# Altium PCB IFA_ESP32.PcbDoc
Units mil, origin at the board's own origin, x right, y up, seen from the top; angles counter-clockwise.
Board outline 1810 x 1230 mil, 4 copper layers (Top Layer, Int1 (GND), Int2 (PWR), Bottom Layer), stack 61.653 mil thick; 42 components, 32 nets, 159 pads, 130 vias.
Unrouted connection lines stored in the file: 1.
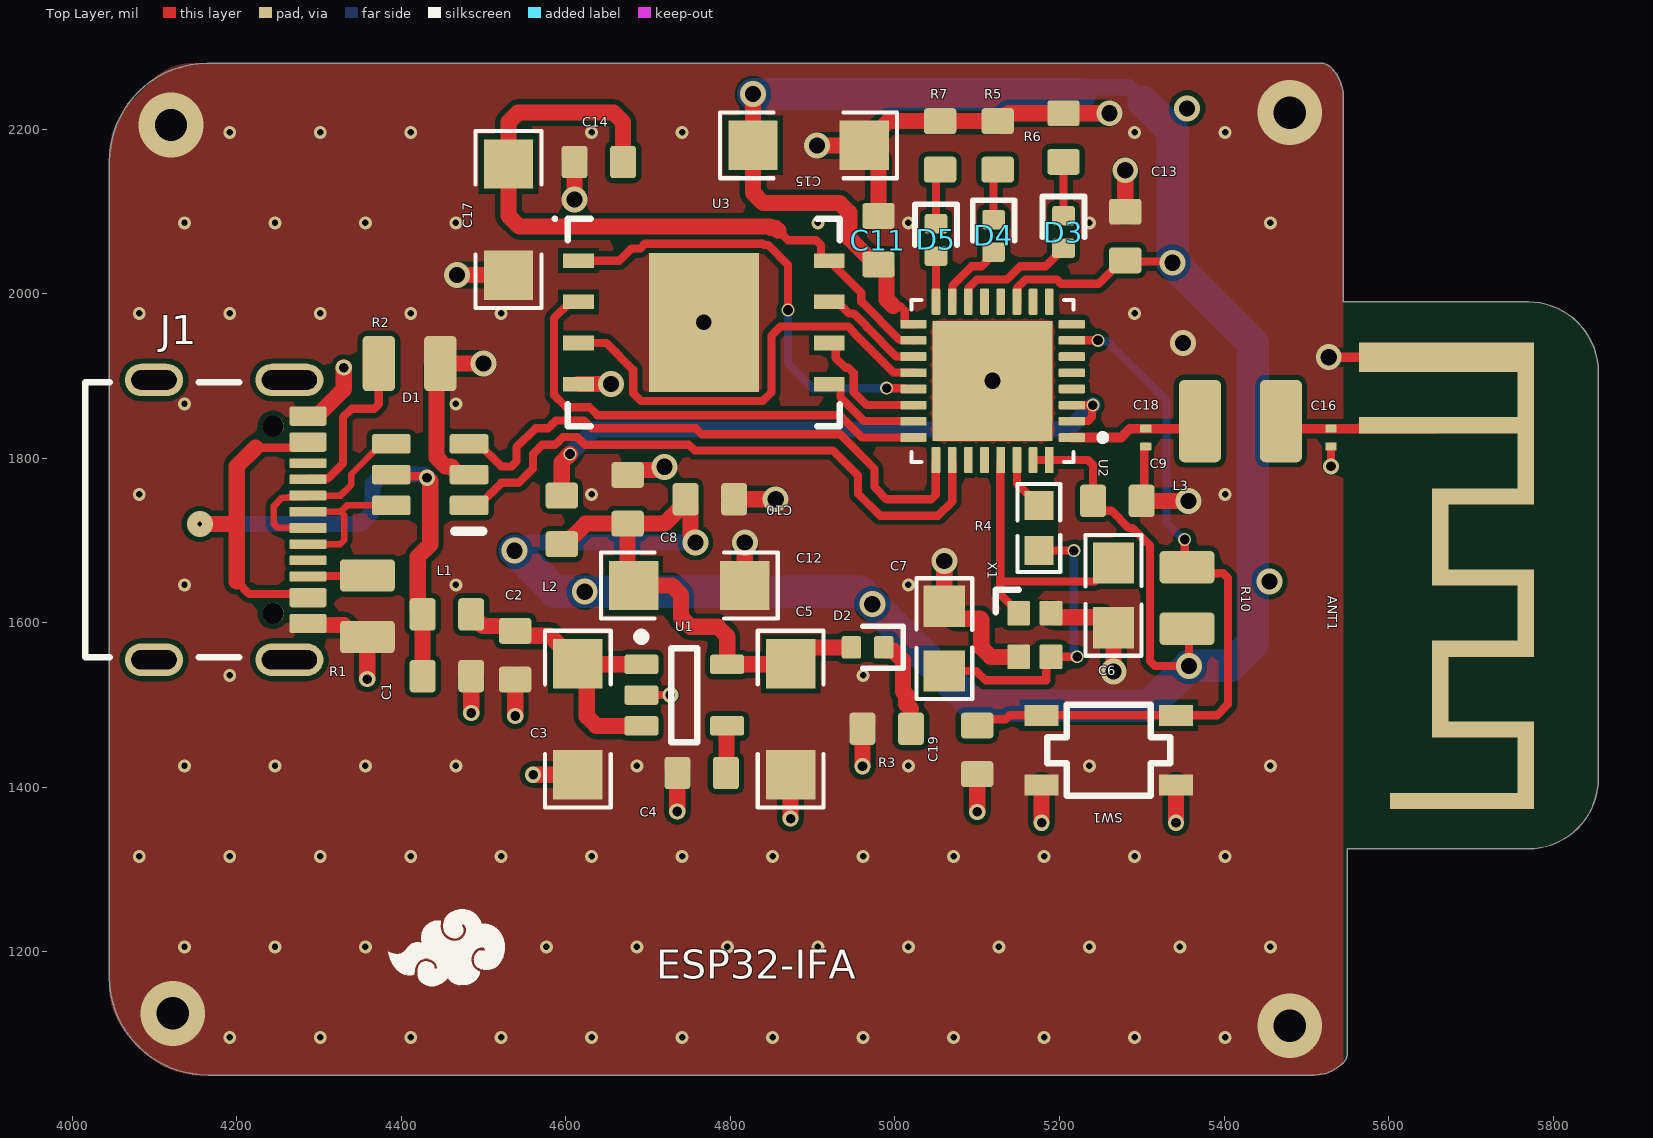
[diagram p0: Top Layer view]
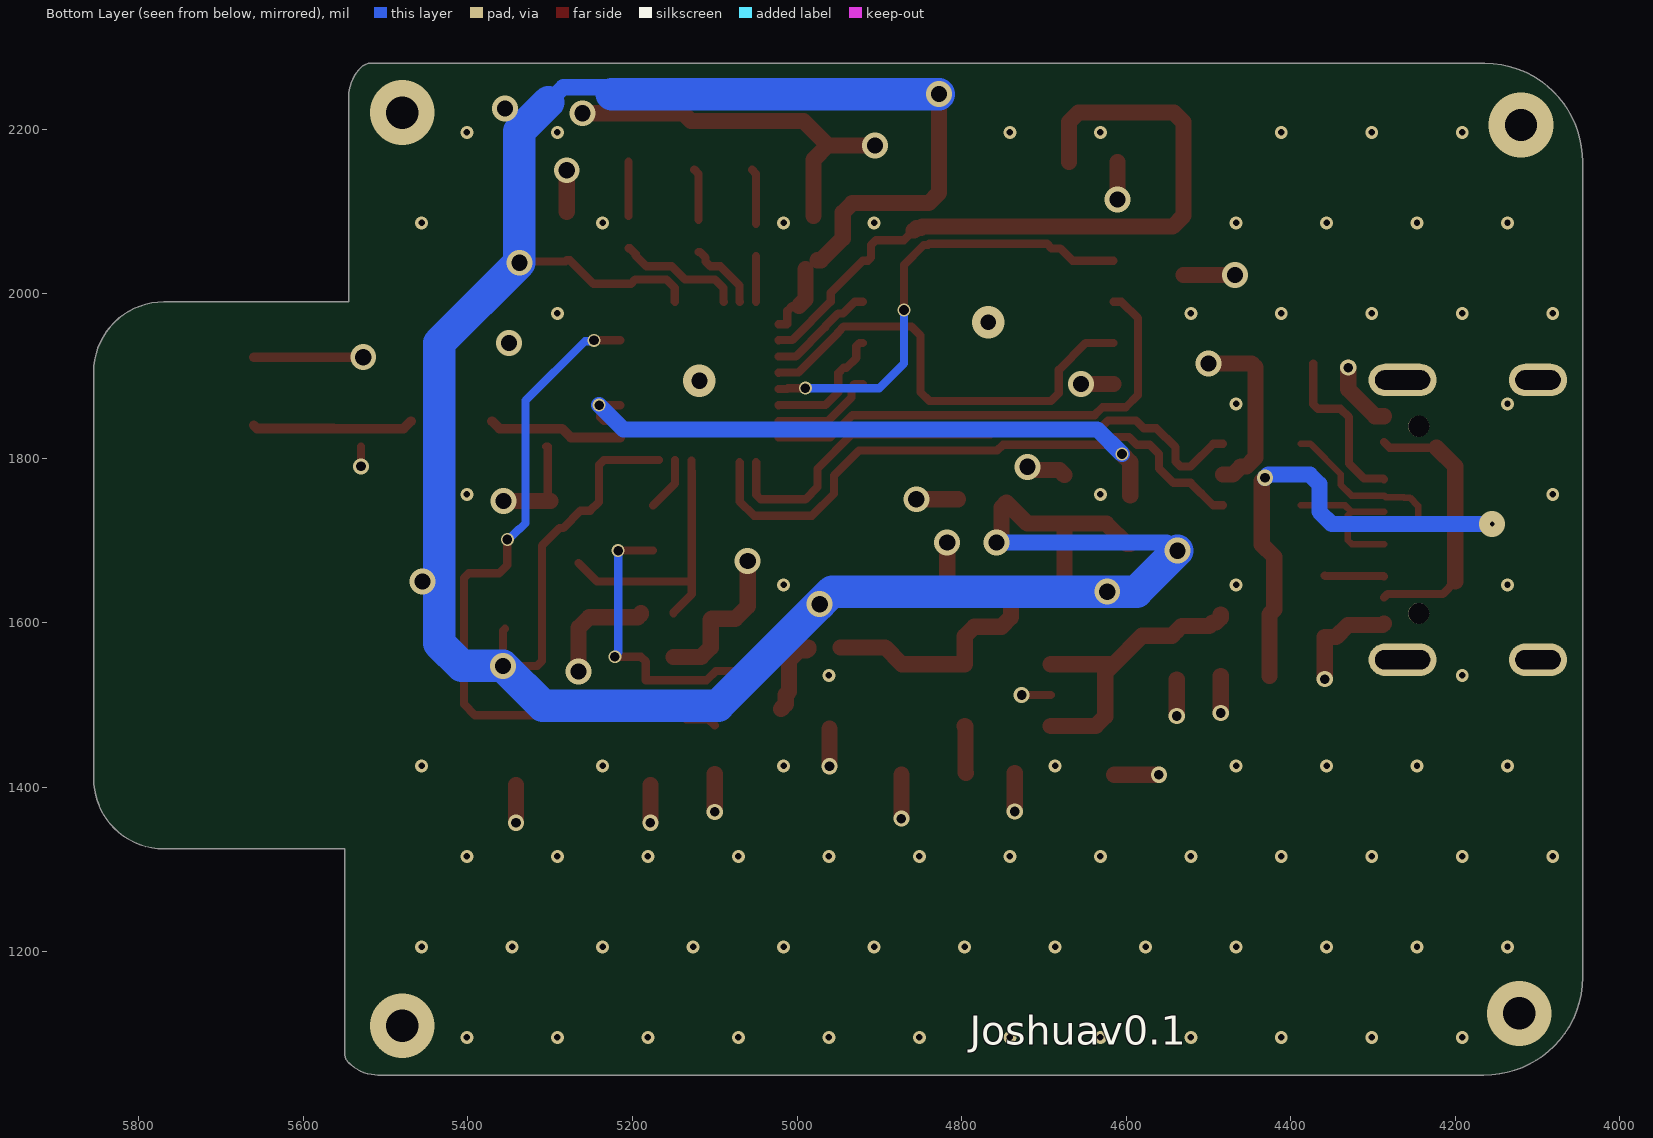
[diagram p1: Bottom Layer view, seen from below]
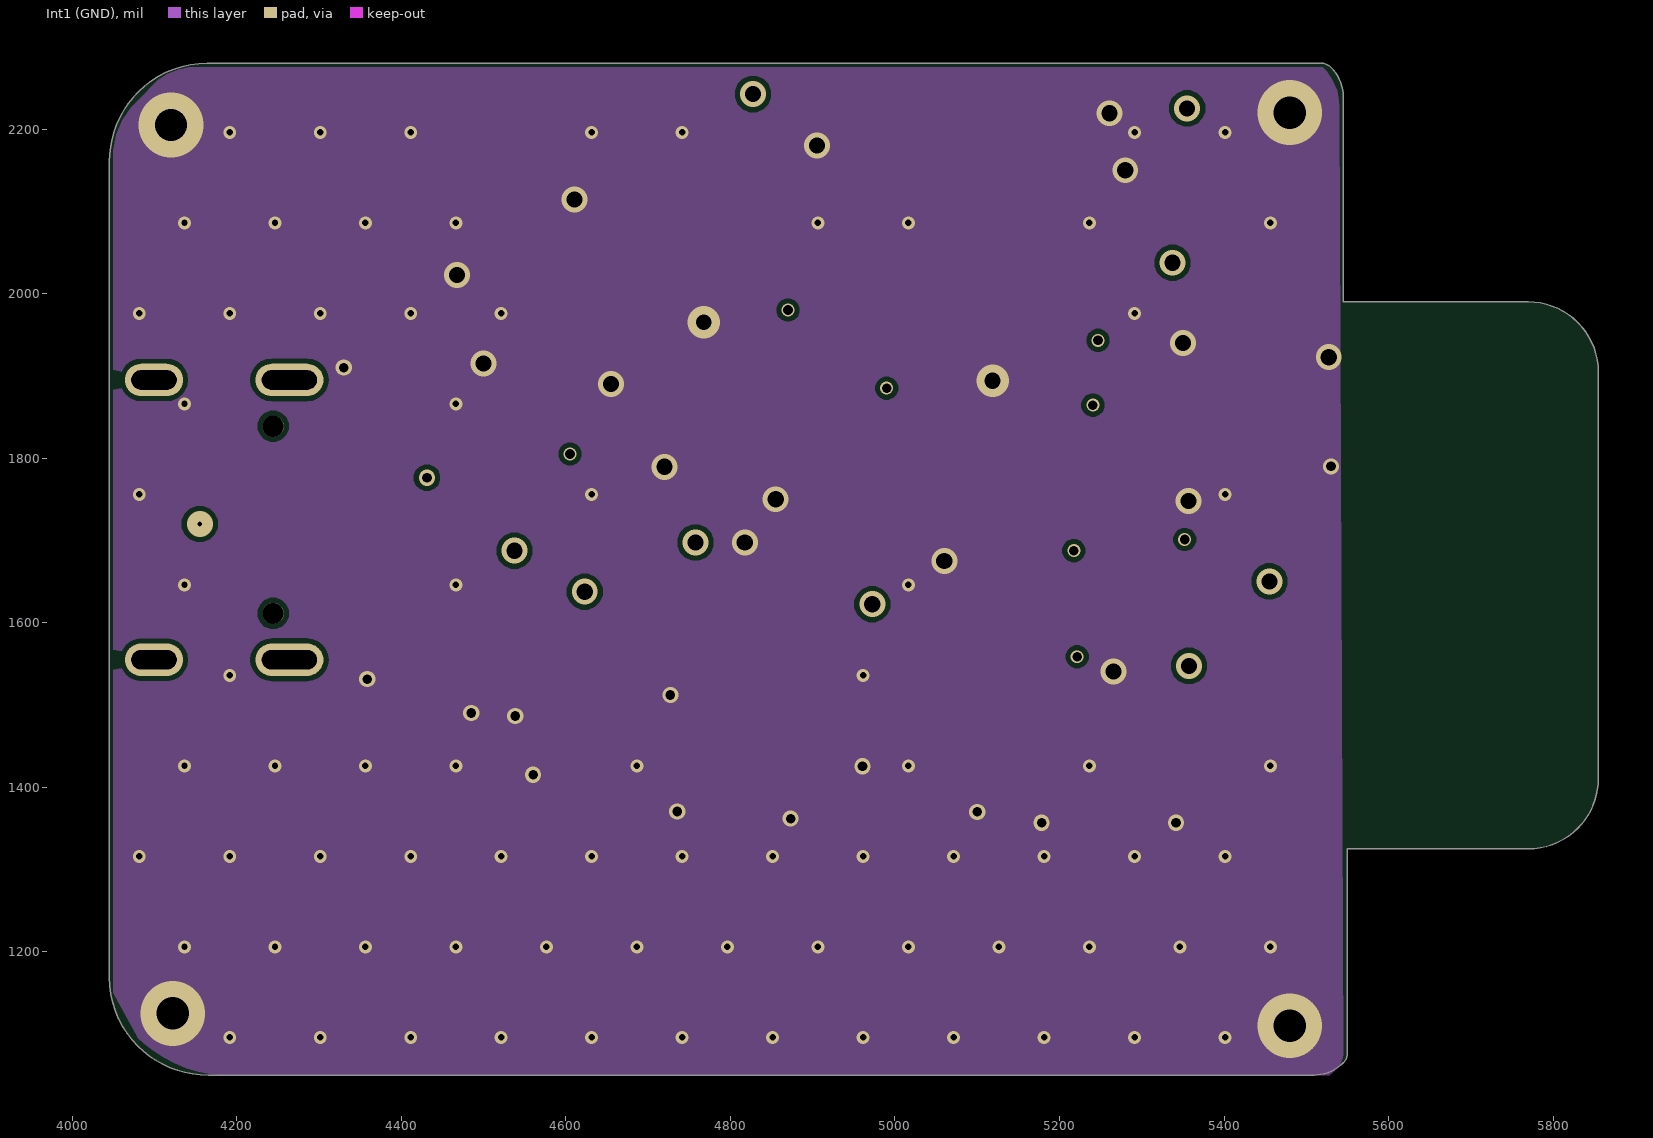
[diagram p2: Int1 (GND)]
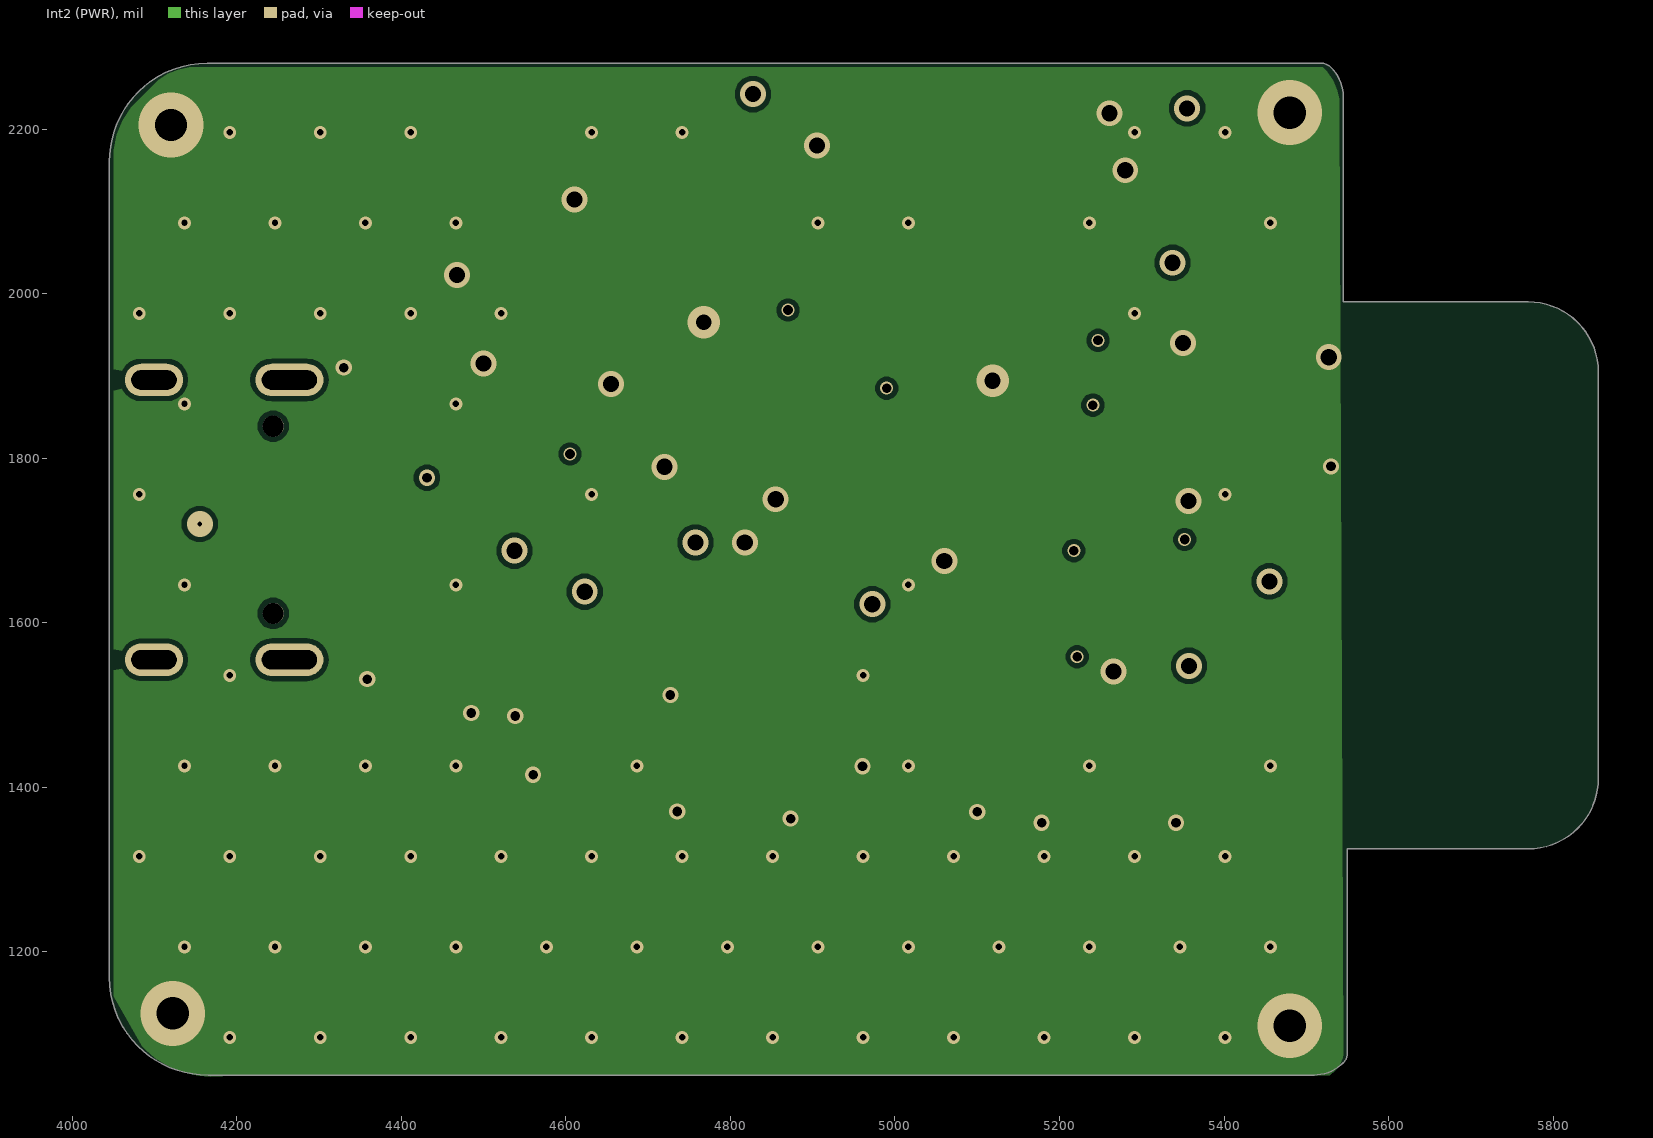
[diagram p3: Int2 (PWR)]
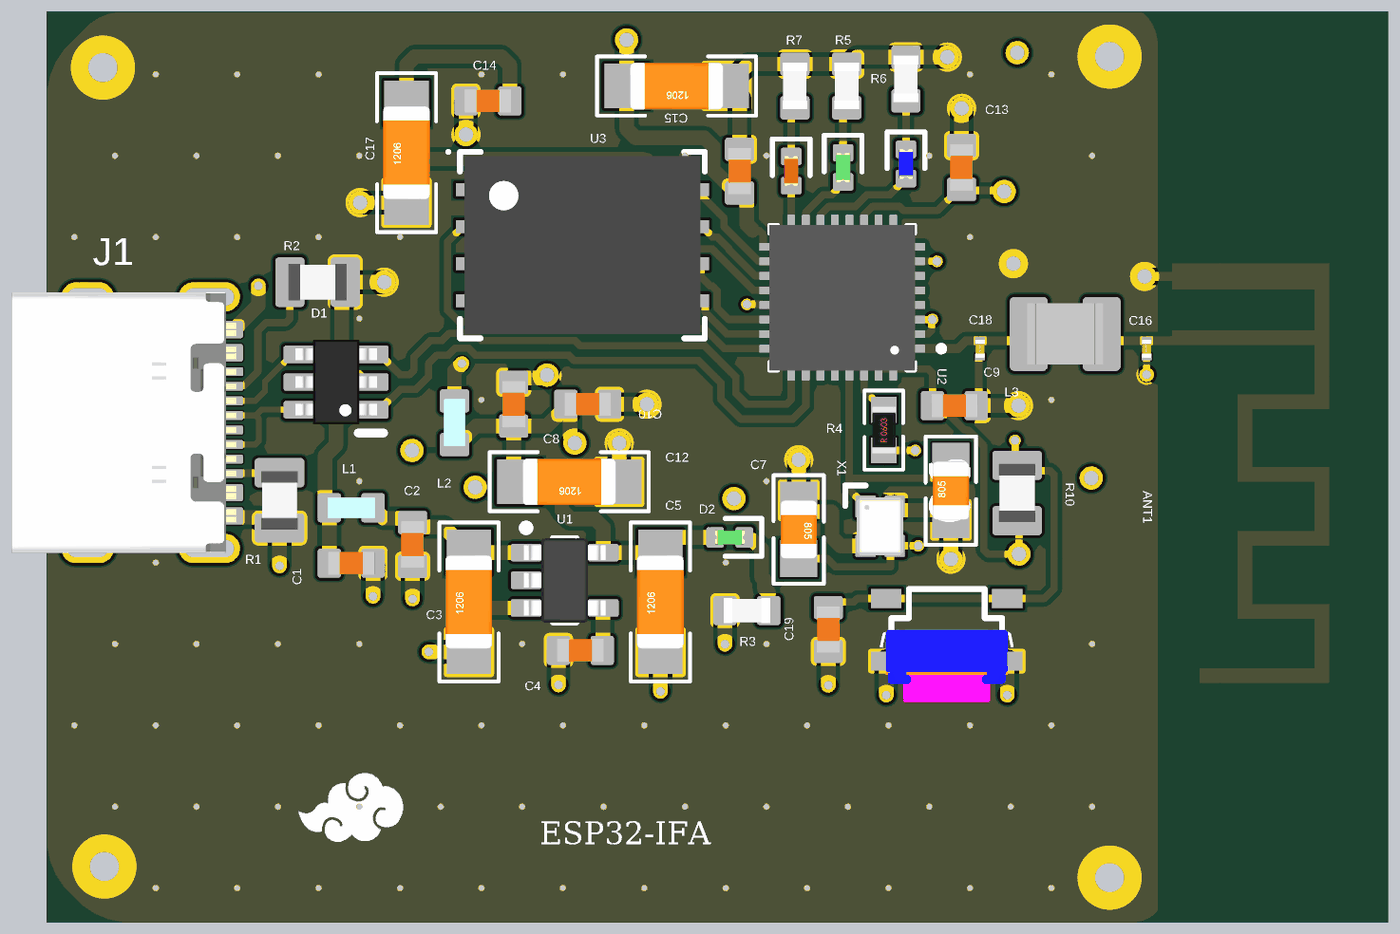
[diagram p4: 3D render of the assembled board from above, using the file's embedded part models]

## Layer stack, top to bottom
Top Solder: solder mask 1, SM-001, Dk 4
Top Layer: signal copper 1.378
Dielectric 1: prepreg 7.992, PP-017, Dk 4.3
Int1 (GND): signal copper 1.181
Dielectric 3: core 40.551, Core-039, Dk 4.8
Int2 (PWR): signal copper 1.181
Dielectric 5: prepreg 7.992, PP-017, Dk 4.3
Bottom Layer: signal copper 1.378
Bottom Solder: solder mask 1, SM-001, Dk 4

## Board outline
4045,1168.99 4045,2160 cw(c4165.71,2160) 4080.36,2245.36 cw(c4163.99,2161.72) 4163.99,2280 5517.93,2280 cw(c5517.93,2262.93) 5530,2275 cw(c5493.79,2238.79) 5545,2238.79 5545,1990 5769.64,1990 cw(c5769.64,1904.64) 5830,1965 cw(c5769.64,1904.64) 5855,1904.64 5855,1410.36 cw(c5769.64,1410.36) 5830,1350 cw(c5769.64,1410.36) 5769.64,1325 5550,1325 5550,1077.07 cw(c5532.93,1077.07) 5545,1065 cw(c5508.79,1101.21) 5508.79,1050 5510,1050 4165,1050 cw(c4165,1170.71) 4079.64,1085.36 cw(c4163.28,1168.99)

## Design rules (kind name [scope] priority, off if disabled: settings)
Clearance [All] p1: gap=6 ignorepadtopadclearanceinfootprint=TRUE
DiffPairsRouting [InDifferentialPair('MCU_USB_D')] p1: maxlimit=10 minlimit=10 mostfreqgap=10 toplayer_minwidth=8 toplayer_maxwidth=15 toplayer_prefwidth=15 midlayer1_minwidth=8 midlayer1_maxwidth=15 midlayer1_prefwidth=15 midlayer2_minwidth=8 midlayer2_maxwidth=15 midlayer2_prefwidth=15 bottomlayer_minwidth=8 bottomlayer_maxwidth=15 bottomlayer_prefwidth=15 maxuncoupledlength=500
PolygonConnect [All] p1: connectstyle=Direct reliefconductorwidth=10 reliefentries=4 polygonreliefangle="90 Angle" airgapwidth=10
RoutingVias [All] p1: holewidth=11.81 width=19.68 viastyle="Through Hole" minholewidth=6 minwidth=11.81 maxholewidth=39.37 maxwidth=78.74
SolderMaskExpansion [All] p1: expansion=4 istentingtop=FALSE
SupplyNets "Schematic Supply Nets_4" [InNet('+VBUS')] p1: voltage=0.000
SupplyNets "Schematic Supply Nets_3" [InNet('VDD_SPI')] p2: voltage=0.000
SupplyNets "Schematic Supply Nets_2" [InNet('GND')] p3: voltage=0.000
SupplyNets "Schematic Supply Nets_1" [InNet('+VBUS_FLT')] p4: voltage=0.000
SupplyNets "Schematic Supply Nets" [InNet('3V3')] p5: voltage=0.000
Width [All] p1: maxlimit=39.37 minlimit=10 preferedwidth=10
29 further rules are at their usual default settings.

## Classes and differential pairs
differential pair USB_D: +USB_D_P -USB_D_N
differential pair MCU_USB_D: +MCU_USB_D_P -MCU_USB_D_N

## Components (designator, comment, footprint, x,y, rotation, side; value= is the part's Value field where it differs from the comment)
ANT1 "PCB Antenna 2.4GHz 50Ohm" ANT_IFA_USB_2_4GHZ_50R 5564.06,1922.72 r270 top
C1 "100nF" CAP_0603 4455.36,1535 r180 top
C2 "100nF" CAP_0603 4538.33,1560.46 r90 top
C3 "10uF" CAP_1206 4614.33,1482.68 r90 top
C4 "100nF" CAP_0603 4765,1417.26 r0 top
C5 "10uF" CAP_1206 4873.02,1482.68 r90 top
C6 "12pF" CAP_0805 5265.57,1633.14 r90 top
C7 "12pF" CAP_0805 5060,1580.62 r270 top
C8 "100nF" CAP_0603 4675,1750 r270 top
C9 "100nF" CAP_0603 5270.25,1748.06 r180 top
C10 "100nF" CAP_0603 4775,1750 r180 top
C11 "100nF" CAP_0603 4980,2065.04 r270 top
C12 "10uF" CAP_1206 4750,1645 r180 top
C13 "100nF" CAP_0603 5280,2070 r270 top
C14 "100nF" CAP_0603 4640,2160 r0 top
C15 "10uF" CAP_1206 4895,2180 r180 top
C16 "3p3" CAP_0201 5530,1825 r90 top
C17 "10uF" CAP_1206 4530,2090 r90 top
C18 "3p3" CAP_0201 5305,1825 r90 top
C19 "1uF" CAP_0603 5100,1445.46 r90 top
D1 "USBLC6-2SC6" SOT-23-6 4435,1780 r90 top
D2 "GREEN" LED_0402_GREEN 4966.74,1570 r0 top
D3 "BLUE" LED_0402_BLUE 5204.91,2074.73 r90 top
D4 "GREEN" LED_0402_GREEN 5119.91,2070.2 r90 top
D5 "RED" LED_0402_RED 5049.91,2065.2 r90 top
J1 "USB4105-GF-A-060" USB4105-GF-A-060 4192.93,1725 r270 top
L1 "2nH" IND_0603 4455.36,1610 r0 top
L2 "2nH" IND_0603 4595,1725 r270 top
L3 "2n2" IND_1008 5420,1845 r180 top
R1 "5k1" RES_0805 4358.61,1620 r90 top
R2 "5k1" RES_0805 4410,1915 r180 top
R3 "1k" RES_0603#1 4990,1471.06 r0 top
R4 "1.6K" RES_0603#2 5175,1715.06 r90 top
R5 "R0603" RES_0603#1 5204.91,2189.73 r270 top
R6 "R0603" RES_0603#1 5124.91,2180.2 r270 top
R7 "R0603" RES_0603#1 5054.91,2180.2 r270 top
R10 "5k1" RES_0805 5355,1630 r270 top
SW1 "SKRPANE010" SKRPANE010 5260,1445 r180 top
U1 "SPX3819M5-L-3-3/TR" SOT-23-5 4743.87,1511.98 r0 top
U2 "ESP32-C3" QFN50P500X500X90-33N 5118.74,1893.96 r180 top
U3 "W25Q128JVEIQ" WSON-8-8X6 4767.74,1965 r0 top
X1 "40MHz" XTAL_2016 5170,1585 r270 top

## Footprints (in the part's own frame and the unit in brackets; to place one, negate y for a bottom-side part, rotate by r counter-clockwise, add the part's x,y. Pads: shape width x height; smd on the part's side, far side on the other; paste and mask are expansions set on the pad)
ANT_IFA_USB_2_4GHZ_50R [mm]
  rect 5x0.5 smd paste-2539.97 mask+0.102: 1(2.05,5.15)
  rect 0.5x4.9 smd paste-2539.97 mask+0.102: 1(2.1,2.45)
  rect 0.5x2.64 smd paste-2539.97 mask+0.102: 1(4.3,3.58) 1(6.8,3.58) 1(9,3.58) 1(11.5,3.58)
  rect 2x0.5 smd paste-2539.97 mask+0.102: 1(5.55,2.51) 1(10.25,2.51)
  rect 2.7x0.5 smd paste-2539.97 mask+0.102: 1(7.9,5.15) 1(12.6,5.15)
  rect 0.5x3.94 smd paste-2539.97 mask+0.102: 1(13.7,2.93)
  rect 0.9x4.9 smd paste-2539.97 mask+0.102: 2(0,2.45)
CAP_0201 [mm]
  rrect25% 0.25x0.35 smd mask+0.05: 1(-0.275,0) 2(0.275,0)
  body extent -0.32,-0.17 0.32,0.16, height 0.34
CAP_0603 [mm]
  rrect25% 0.8x1 smd: 1(-0.75,0) 2(0.75,0)
  body extent -0.8,-0.4 0.8,0.4, height 0.51
CAP_0805 [mil] "Ceramic Capacitor"
  rect 50x50 smd mask+3: 1(-39.37,0) 2(39.37,0)
  silkscreen extent -73,-34 73,34, body extent -39,-25 39,25, height 31
CAP_1206 [mil] "Ceramic Capacitor"
  rect 60x60 smd: 1(-67.49,-0.2) 2(67.51,-0.2)
  silkscreen extent -107,-40 108,40, body extent -63,-31 63,32, height 39
IND_0603 [mm]
  rrect25% 0.8x1 smd: 1(-0.75,0) 2(0.75,0)
  body extent -0.81,-0.37 0.81,0.37, height 0.87
IND_1008 [mm]
  rrect25% 1.3x2.54 smd: 1(-1.25,0) 2(1.25,0)
  body extent -1.3,-1.05 1.3,1.05, height 1.71
LED_0402_BLUE [mm]
  rrect25% 0.6x0.7 smd: A(-0.5,0) K(0.5,0)
  silkscreen extent -0.15,-0.65 1.1,0.65, body extent -0.51,-0.25 0.51,0.25, height 0.45
LED_0402_GREEN [mm]
  rrect25% 0.6x0.7 smd: A(-0.5,0) K(0.5,0)
  silkscreen extent -0.15,-0.65 1.1,0.65, body extent -0.51,-0.25 0.51,0.25, height 0.45
LED_0402_RED [mm]
  rrect25% 0.6x0.7 smd: A(-0.5,0) K(0.5,0)
  silkscreen extent -0.15,-0.65 1.1,0.65, body extent -0.51,-0.25 0.51,0.25, height 0.45
QFN50P500X500X90-33N [mm]
  rrect25% 0.81x0.27 smd mask+0: 1(-2.445,1.75) 2(-2.445,1.25) 3(-2.445,0.75) 4(-2.445,0.25) 5(-2.445,-0.25) 6(-2.445,-0.75) 7(-2.445,-1.25) 8(-2.445,-1.75) 17(2.445,-1.75) 18(2.445,-1.25) 19(2.445,-0.75) 20(2.445,-0.25) 21(2.445,0.25) 22(2.445,0.75) 23(2.445,1.25) 24(2.445,1.75)
  rrect25% 0.27x0.81 smd mask+0: 9(-1.75,-2.445) 10(-1.25,-2.445) 11(-0.75,-2.445) 12(-0.25,-2.445) 13(0.25,-2.445) 14(0.75,-2.445) 15(1.25,-2.445) 16(1.75,-2.445) 25(1.75,2.445) 26(1.25,2.445) 27(0.75,2.445) 28(0.25,2.445) 29(-0.25,2.445) 30(-0.75,2.445) 31(-1.25,2.445) 32(-1.75,2.445)
  rect 3.7x3.7 smd paste-0.68 mask+0.05: 33(0,0)
  silkscreen extent -3.5,-2.5 2.5,2.5, body extent -2.5,-2.5 2.5,2.5, height 0.9
RES_0603#1 [mm]
  rrect25% 0.8x1 smd: 1(-0.75,0) 2(0.75,0)
  body extent -0.8,-0.43 0.8,0.43, height 0.52
RES_0603#2 [mm] "CASE: 0603"
  rect 0.889x0.889 smd mask+0.076: 1(-0.698,0) 2(0.699,0)
  silkscreen extent -1.36,-0.66 1.36,0.66, body extent -0.8,-0.4 0.8,0.4, height 0.46
RES_0805 [mm]
  rrect25% 1x1.7 smd: 1(-0.95,0) 2(0.95,0)
  body extent -1,-0.63 1,0.63, height 0.47
SKRPANE010 [mm]
  rect 1.05x0.65 smd: 12(-2.075,1.075) 12(2.075,1.075) 34(-2.075,-1.075) 34(2.075,-1.075)
  silkscreen extent -1.9,-1.4 1.9,1.4, body extent -2.3,-1.6 2.3,1.6, height 2.51
SOT-23-5 [mm] "SOT23, 5-Leads, Body 2,90x2,80mm, Pitch 0,95mm, IPC Medium Density"
  rrect25% 1.05x0.6 smd: 1(-1.325,0.95) 2(-1.325,0) 3(-1.325,-0.95) 4(1.325,-0.95) 5(1.325,0.95)
  silkscreen extent -1.45,-1.45 0.4,1.92, body extent -1.4,-1.45 1.4,1.45, height 1.45
SOT-23-6 [mm]
  rrect25% 0.6x1.2 smd: 1(-0.95,-1.2) 2(0,-1.2) 3(0.95,-1.2) 4(0.95,1.2) 5(0,1.2) 6(-0.95,1.2)
  silkscreen extent -1.75,-1.63 -1.75,-0.76, body extent -1.45,-1.4 1.45,1.4, height 1.45
USB4105-GF-A-060 [mm]
  rrect25% 0.6x1.15 smd mask+0.05: A1B12(-3.2,2.378) A4B9(-2.4,2.378) B1A12(3.2,2.378) B4A9(2.4,2.378)
  rrect25% 0.3x1.15 smd mask+0.05: A5(-1.25,2.378) A6(-0.25,2.378) A7(0.25,2.378) A8(1.25,2.378) B5(1.75,2.378) B6(0.75,2.378) B7(-0.75,2.378) B8(-1.75,2.378)
  round 0.65 hole 0.65 unplated mask+0.05: MH(-2.89,1.303) MH(2.89,1.303)
  oval 1x2.1 hole 0.6 slot 1.7 at 90 deg: SH(-4.32,1.803) SH(4.32,1.803)
  oval 1x1.8 hole 0.6 slot 1.4 at 90 deg: SH(-4.32,-2.377) SH(4.32,-2.377)
  silkscreen extent -4.25,-4.5 4.25,0.25, body extent -4.47,-4.97 4.47,2.73, height 3.27
WSON-8-8X6 [mm] "8-Pad WSON 8x6-mm (Package Code E) (Winbond)"
  rect 0.95x0.45 smd: 1(-3.87,1.905) 2(-3.87,0.635) 3(-3.87,-0.635) 4(-3.87,-1.905) 5(3.87,-1.905) 6(3.87,-0.635) 7(3.87,0.635) 8(3.87,1.905)
  rect 3.4x4.3 smd paste-1.7: 9(0,0)
  silkscreen extent -4.65,-3.2 4.2,3.25, body extent -4.05,-3.05 4.05,3.05, height 0.8
XTAL_2016 [mm]
  rrect10% 0.75x0.7 smd: 1(-0.675,-0.5) 2(0.675,-0.5) 3(0.675,0.5) 4(-0.675,0.5)
  silkscreen extent -1.4,-1.2 -0.7,-0.5, body extent -1,-0.8 1,0.8, height 0.7

## Part data
ANT1: library part ANT_IFA_USB_2_4GHZ_50R, "Inverted F 2.4GHz ISM PCB Antenna 50 Ohm", ComponentLink1Description=Datasheet, ComponentLink1URL=https://www.ti.com/lit/an/swra117d/swra117d.pdf
C1 C2 C4 C8 C9 C10 C11 C13 C14 C19: library part CAP_0603, "Capacitor SMD 0603"
C3 C5 C12 C15 C17: library part CAP_10uF-50V-10%-1206, "10µF ±10% 50V Ceramic Capacitor X7R 1206 (3216 Metric)", Alternate Part Number-1=GRT31CR61H106ME01L, Case/Package=1206, Manufacturer=KEMET, Manufacturer Part Number=CL31B106KBHNNNE, Supplier Part Number-1=CC1206KKX5R9BB106, Supplier-1=SIRICOM
C6 C7: library part CAP_12pF-50V-5%-0805, "12pF ±5% 50V Ceramic Capacitor C0G, NP0 0805 (2012 Metric)", Alternate Part Number-1=NA, Case/Package=0805, Manufacturer=KEMET, Manufacturer Part Number=CC0805JRNPO9BN120, Supplier Part Number-1=0805N120J500CT, Supplier-1=SIRICOM
C16 C18: library part CAP_0201, "Capacitor SMD 0201"
D1: "Low-Capacitance ESD Protection USB", Manufacturer=STMicroelectronics, Distributor Link=https://www.mouser.de/ProductDetail/STMicroelectronics/USBLC6-2SC6?qs=po45yt2pPpu%2FhNIlwQdTlg%3D%3D, Manufacturer Part Number=USBLC6-2SC6
D2 D4: library part LED_0402_GREEN, "LED 0402 GREEN SMD"
D3: library part LED_0402_BLUE, "LED 0402 BLUE SMD"
D5: library part LED_0402_RED, "LED 0402 RED SMD"
J1: "USB Connector Type C SMT 12 Pin", Manufacturer=GCT, Distributor Link=https://eu.mouser.com/ProductDetail/GCT/USB4105-GF-A-060?qs=QNEnbhJQKvY2mocwNJzgfA%3D%3D, Manufacturer Part Number=USB4105-GF-A-060
L1 L2: library part IND_0603, "Inductor SMD 0603"
L3: library part IND_1008, "Inductor SMD 1008"
R1 R2 R10: library part RES_0805, "Resistor SMD 0805"
R3 R5 R6 R7: library part RES_0603, "Resistor SMD 0603"
R4: library part RES_1.6K-0.1W-1%-0603, "1.6 kOhms ±1% 0.1W, 1/10W Chip Resistor 0603 (1608 Metric) Thin Film", Alternate Part Number-1=NA, Case/Package=0603, Manufacturer=NA, Manufacturer Part Number=NA, Supplier Part Number-1=NA, Supplier-1=SIRICOM
SW1: "Tactile Switch SMD SPST", Manufacturer="Alps Alpine", Manufacturer Part Number=SKRPANE010
U1: "500mA +3.3V Low-Noise LDO Voltage Regulator", Manufacturer=MaxLinear, Manufacturer Part Number=SPX3819M5-L-3-3/TR
U2: Package=None, Availability=Unavailable, MF="{'manufacturer': u'Espressif Systems'}", MP=ESP32-C3, Price=None
U3: "3V 128M-BIT SERIAL FLASH MEMORY WITH DUAL/QUAD SPI & QPI & DTR WSON-8", Manufacturer=Winbond, Manufacturer Part Number=W25Q128JVEIQ
X1: library part XTAL_2016, "Crystal SMD 4-Pin 2.0x1.6mm"

## Via types
v1: diameter 15.75, hole 7.87, Top Layer to Bottom Layer, tented both sides, 77 vias
v2: diameter 31.5, hole 19.68, Top Layer to Bottom Layer, 24 vias
v3: diameter 19.68, hole 11.81, Top Layer to Bottom Layer, 14 vias
v4: diameter 15.75, hole 11.81, Top Layer to Bottom Layer, 8 vias
v5: diameter 78.74, hole 39.37, Top Layer to Bottom Layer, 4 vias
v6: diameter 39.37, hole 19.68, Top Layer to Bottom Layer, 1 vias
v7: diameter 39.37, hole 19, Top Layer to Bottom Layer, 1 vias
v8: diameter 31.5, hole 5.91, Top Layer to Bottom Layer, 1 vias

## Nets (pads, with @x,y where several pads share a name; then routed paths per layer and width w, separated by ;. In a path a pad name is that pad's centre, name@x,y a point inside that pad or via, vN(x,y) a via of type N, cw(c..) or ccw(c..) an arc to the next point about the centre after c; other vN are vias at no path point)
3V3: C5.2 C8.2 C9.2 C10.2 C11.2 C12.2 C13.2 C15.2 D2.A L2.2 R10.2 U1.5 U2.11 U2.17 U2.31 U2.32 | length 4164.4
  Top Layer w10: 4997.73,1985 5005.97,1985 5011.83,1979.14 5011.83,1963.17 5012.14,1962.86 U2.17 ; U2.11 5148.58,1990.53 5148.58,2006.89 5158.86,2017.16 5196.73,2017.16 5201.95,2011.95 5247.54,2011.95 5276.06,2040.47 C13.2 5281.49,2038.98 5336,2038.98 v2(5337.49,2037.49) ; U2.31 U2.32 5234.86,1797.7 5240.72,1791.84 C9.2 ; C9.2@5240.72,1746.82 5251.47,1736.08 5263.08,1736.08 5284.15,1715 5288.63,1715 5310,1693.63 5310,1553.35 5315.86,1547.49 v2(5357.49,1547.49) 5357.49,1590.11 R10.2
  Top Layer w19.68: L2.2 4598.94,1695.47 4623.94,1720.47 C8.2 ; v2(4757.49,1697.49) 4757.49,1700.69 4751.38,1706.8 4751.38,1740.16 4745.47,1746.06 4719.88,1720.47 C8.2 ; v2(4827.49,2242.49) C15.2 4827.49,2122.51 4840,2110 4932.94,2110 4944.47,2098.47 4944.47,2067.1 4971.06,2040.51 C11.2@4975,2040.51 ; D2.A 4893.03,1570 C5.2 4872.41,1549.38 U1.5 4796.04,1583.47 4784.5,1595 4751.53,1595 4740,1606.53 4740,1633.66 4728.47,1645.2 C12.2 4675,1652.69 C8.2 ; C11.2@4989.84,2029.6 4989.84,1992.89 4997.73,1985
  Bottom Layer w19.68: v2(4537.49,1687.49) 4540.69,1687.49 4550.69,1697.49 v2(4757.49,1697.49) ; 5225.38,2242.49 5233.74,2250.85 5284.15,2250.85 5302.18,2232.82
  Bottom Layer w39.37: v2(4537.49,1687.49) 4587.3,1637.69 v2(4622.97,1637.69) 4957.3,1637.69 v2(4972.49,1622.49) 5095.85,1499.13 5309.13,1499.13 v2(5357.49,1547.49) 5407.49,1547.49 5435,1575 5435,1939.98 v2(5337.49,2037.49) 5337.49,2197.51 5302.18,2232.82 ; v2(4827.49,2242.49) 5225.38,2242.49
  other v2: 5455.2,1650.2 5355.2,2225.2
+VBUS: C1.2 D1.5 J1.A4B9 J1.B4A9 L1.1 | length 996.8
  Top Layer w10: 4200,1650 4214.98,1635.02 4282.02,1635.02 J1.B4A9 ; 4222.68,1812.68 4279.72,1812.68 J1.A4B9 ; D1.5 4389.8,1777.96 4429.25,1777.96 v3(4431.11,1776.11)
  Top Layer w19.68: v8(4155,1720) 4200,1720 ; 4200,1650 4200,1720 ; 4222.68,1812.68 4200,1790 4200,1720 ; C1.2 L1.1 4420,1615.83 4420,1680 4435,1695 4435,1772.21 v3(4431.11,1776.11)
  Bottom Layer w19.68: v8(4155,1720) 4350,1720 4365,1735 4365,1768.47 4376.53,1780 4427.21,1780 v3(4431.11,1776.11)
+VBUS_FLT: C2.2 C3.2 L1.2 U1.1 U1.3 | length 371.6
  Top Layer w19.68: L1.2 4484.89,1606.06 4490.79,1600.16 4494.73,1600.16 4498.99,1595.9 4532.42,1595.9 C2.2 4544.24,1584.09 4580.62,1584.09 C3.2 ; U1.3 4636.96,1474.57 4625.43,1486.11 4625.43,1539.29 4615.33,1549.38 U1.1
CHIP_EN: C19.2 R10.1 SW1.34 U2.7 | length 884.2
  Top Layer w10: C19.2 5107.56,1482.56 5134.69,1482.56 5139.45,1487.32 5178.31,1487.32 5341.69,1487.32 5391.46,1487.32 5405,1500.86 5405,1654.14 5399.14,1660 5362.4,1660 5352.24,1670.16 v4(5352.24,1701.13) ; U2.7 v4(5246.83,1943.17)
  Bottom Layer w10: v4(5246.83,1943.17) 5247.93,1942.07 5257.93,1942.07 5330,1870 5330,1720.86 5337.07,1713.79 5338.02,1713.79 5350.68,1701.13 v4(5352.24,1701.13)
GND: ANT1.2 C1.1 C2.1 C3.1 C4.1 C5.1 C6.1 C7.1 C8.1 C9.1 C10.1 C11.1 C12.1 C13.1 C14.1 C15.1 C16.1 C17.1 C18.1 C19.1 D1.2 J1.A1B12 J1.B1A12 R1.1 R2.1 R3.1 R5.1 R6.1 R7.1 SW1.12 U1.2 U2.33 U3.4 U3.9 X1.2 X1.4 | length 2314.9
  Top Layer w10: U1.2 v3(4726.98,1511.98) ; C9.1 5303.11,1751.39 5303.11,1814.09 5303.19,1814.17 C18.1 ; v3(5530,1790) C16.1
  Top Layer w11.81: v2(5527.28,1922.72) ANT1.2
  Top Layer w19.68: J1.B1A12 4288.5,1597.05 4330.38,1597.05 4344.83,1582.6 R1.1 v3(4358.61,1531.39) ; J1.A1B12 4297.36,1850.98 4330,1883.63 v3(4330,1910) ; v2(4467.49,2022.51) C17.1 ; D1.2 4470.43,1780 4460.69,1789.75 4453.79,1789.75 4442.78,1800.76 4442.78,1910.38 R2.1 v2(4500,1915) ; v3(4484.89,1490.11) C1.1 ; v3(4538.33,1486.67) C2.1 ; v3(4560.19,1415.19) C3.1 ; v2(4610.47,2114.53) C14.1 ; U3.4 v2(4655,1890) ; C8.1 4680.91,1785.43 4712.77,1785.43 4716.8,1789.46 v2(4720,1789.46) ; v3(4735.47,1370.47) C4.1 ; C10.1 v2(4855,1750) ; C12.1 v2(4817.49,1697.51) ; v3(4873.21,1361.79) C5.1 ; v2(4905.2,2180.2) C15.1 ; v3(4960.47,1425.47) R3.1 ; C11.1 4980,2162.69 C15.1 ; v2(5060,1675) C7.1 5075.16,1604.83 5103.64,1604.83 5105,1603.47 5105,1569.96 5116.53,1558.43 X1.2 ; v3(5100,1370) C19.1 ; R6.1 R7.1 4992.02,2209.73 C15.1 ; R6.1@5128.84,2209.73 5138.37,2219.26 R5.1 v2(5260.74,2219.26) ; v3(5178.31,1356.69) SW1.12@5178.31,1402.68 ; X1.4 5189.69,1610.59 5193.62,1606.65 5252.68,1606.65 C6.1 v2(5265.57,1540.57) ; C13.1 v2(5280,2150) ; C9.1 v2(5356.94,1748.06) ; v3(5341.69,1356.69) SW1.12@5341.69,1402.68
  other v1: 4191.38,1095.89 4301.38,1095.89 4411.38,1095.89 4521.38,1095.89 4631.38,1095.89 4741.38,1095.89 4851.38,1095.89 4961.38,1095.89 5071.38,1095.89 5181.38,1095.89 5291.38,1095.89 5401.38,1095.89 4136.38,1205.89 4246.38,1205.89 4356.38,1205.89 4466.38,1205.89 4576.38,1205.89 4686.38,1205.89 4796.38,1205.89 4906.38,1205.89 5016.38,1205.89 5126.38,1205.89 5236.38,1205.89 5346.38,1205.89 5456.38,1205.89 4081.38,1315.89 4191.38,1315.89 4301.38,1315.89 4411.38,1315.89 4521.38,1315.89 4631.38,1315.89 4741.38,1315.89 4851.38,1315.89 4961.38,1315.89 5071.38,1315.89 5181.38,1315.89 5291.38,1315.89 5401.38,1315.89 4136.38,1425.89 4246.38,1425.89 4356.38,1425.89 4466.38,1425.89 4686.38,1425.89 5016.38,1425.89 5236.38,1425.89 5456.38,1425.89 4191.38,1535.89 4961.38,1535.89 4136.38,1645.89 4466.38,1645.89 5016.38,1645.89 4081.38,1755.89 4631.38,1755.89 5401.38,1755.89 4136.38,1865.89 4466.38,1865.89 4081.38,1975.89 4191.38,1975.89 4301.38,1975.89 4411.38,1975.89 4521.38,1975.89 5291.38,1975.89 4136.38,2085.89 4246.38,2085.89 4356.38,2085.89 4466.38,2085.89 4906.38,2085.89 5016.38,2085.89 5236.38,2085.89 5456.38,2085.89 4191.38,2195.89 4301.38,2195.89 4411.38,2195.89 4631.38,2195.89 4741.38,2195.89 5291.38,2195.89 5401.38,2195.89
  other v2: 5350,1940
  other v5: 5480,1110 4122,1125 4120,2205 5480,2220
  other v6: 5118.74,1893.96
  other v7: 4767.74,1965
LED1: D3.A U2.14 | length 153.3
  Top Layer w10: U2.14 5089.53,1990.53 5089.53,2006.89 5099.8,2017.16 5136.23,2017.16 5152.23,2033.16 5183.03,2033.16 5196.13,2046.27 5196.13,2048.23 5202.94,2055.04 D3.A
LED2: D4.A U2.15 | length 89.4
  Top Layer w10: U2.15 5069.84,1990.53 5069.84,2009.83 5093.18,2033.16 5105.27,2033.16 5111.13,2039.02 5111.13,2043.71 5117.94,2050.52 D4.A
LED3: D5.A U2.16 | length 55.3
  Top Layer w10: U2.16@5049.87,1990.25 D5.A
LED_3V3_K: D2.K R3.2 | length 94.4
  Top Layer w19.68: D2.K 4986.43,1568.03 4988.39,1566.06 4998.15,1566.06 5009.69,1554.53 5009.69,1516.37 5013.62,1512.44 5013.62,1500.91 5019.53,1495
LNA_IN: C18.2 L3.2 U2.1 | length 163.1
  Top Layer w11.81: U2.1 5275.06,1825.06 5285.83,1835.83 C18.2 ; C18.2@5305.98,1835.83 5361.61,1835.83 L3.2
MCU_USB_D_N: D1.3 U2.25 | length 706.7
  Top Layer w10: D1.3 4494.06,1817.4 4508.65,1802.81 ; 4508.69,1802.81 4521.5,1790 4534.14,1790 4540,1795.86 4540,1813.28 4562.93,1836.21 4578.45,1836.21 4588.08,1845.84 4621.92,1845.84 4631.55,1836.21 4757.93,1836.21 4765,1829.14 4932.98,1829.14 4975,1787.12 4975,1765 4990,1750 5044.14,1750 5049.69,1755.54 5049.69,1770 ; 5049.67,1770.01 5049.67,1794.67 U2.25@5050,1795
MCU_USB_D_P: D1.1 U2.26 | length 739.8
  Top Layer w10: D1.1 4494.06,1742.6 4508.65,1757.19 ; 4508.69,1757.19 4521.5,1770 4542.43,1770 4560,1787.57 4560,1805 4571.21,1816.21 4586.74,1816.21 4596.37,1825.84 4613.63,1825.84 4623.26,1816.21 4749.64,1816.21 4756.72,1809.14 4924.69,1809.14 4955,1778.83 4955,1756.72 4981.72,1730 5052.43,1730 5069.69,1747.26 5069.69,1778.28 ; 5069.67,1778.3 5069.67,1794.67 U2.26@5070,1795
NetANT1_1: ANT1.1 C16.2 L3.1 | length 196.8
  Top Layer w11.81: L3.1 5478.39,1835.83 5563.04,1835.83 5563.32,1836.1 5656.57,1836.1 ANT1.1@5660.51,1840.04
NetC4_2: C4.2 U1.4 | length 57.9
  Top Layer w19.68: C4.2 4795.28,1418.01 4795.28,1473.82 U1.4
NetC6_2: C6.2 U2.29 X1.1 | length 341.9
  Top Layer w10: U2.29@5128.27,1797.02 5128.27,1783.97 5127.9,1783.61 5127.9,1650 ; X1.1 5150.31,1612.56 5127.9,1634.97 5127.9,1650 ; C6.2 5243.05,1650 5127.9,1650
NetC7_2: C7.2 R4.1 X1.3 | length 364.4
  Top Layer w10: C7.2 5098.75,1541.25 5110,1530 5183.83,1530 5183.83,1552.57 5189.75,1558.49 5221.51,1558.49 v4(5221.57,1558.56) ; R4.1 v4(5217.43,1687.57)
  Bottom Layer w10: v4(5217.43,1687.57) 5217.43,1564.12 5221.57,1559.98 v4(5221.57,1558.56)
NetD3_K: D3.K R5.2 | length 65.8
  Top Layer w10: D3.K R5.2
NetD4_K: D4.K R6.2 | length 62.9
  Top Layer w10: D4.K 5119.91,2145.67 R6.2
NetD5_K: D5.K R7.2 | length 67.9
  Top Layer w10: D5.K 5049.91,2145.67 R7.2
NetJ1_A5: J1.A5 R2.2 | length 206.2
  Top Layer w10: J1.A5 4287.43,1775.12 4310.98,1775.12 4329.21,1793.35 4329.21,1849.74 4339.48,1860 4366.74,1860 4372.6,1865.86 R2.2
NetJ1_B5: J1.B5 R1.2 | length 72.6
  Top Layer w10: J1.B5 4287.18,1656.75 4357.96,1656.75 R1.2
NetL2_1: L2.1 U2.2 U2.3 | length 782
  Top Layer w10: U2.2 5215.31,1845.06 5234.71,1845.06 5239.47,1849.82 5239.47,1863.33 v4(5240.57,1864.43) U2.3
  Top Layer w19.68: L2.1 4595,1795 v4(4605,1805)
  Bottom Layer w19.68: v4(4605,1805) 4635,1835 5211.14,1835 v4(5240.57,1864.43)
NetR4_2: R4.2 U2.30 | length 66.2
  Top Layer w10: U2.30 5148.27,1769.3 R4.2
SPI_CLK: U2.22 U3.6 | length 155.6
  Top Layer w10: U3.6 4924.14,1940 4928,1936.14 4928,1922 4940.14,1909.86 4943.36,1909.86 4949.81,1903.41 4949.81,1880.19 4965.25,1864.75 5022.17,1864.75 U2.22
SPI_DI: U2.23 U3.5 | length 128.5
  Top Layer w10: U3.5 4929.95,1890 4933.81,1886.14 4933.81,1873.57 4962.31,1845.06 5022.17,1845.06 U2.23
SPI_DO: U2.24 U3.2 | length 589.6
  Top Layer w10: U3.2 4605.54,1990 4585.68,1970.14 4585.68,1876.59 4600.42,1861.84 4628.54,1861.84 4638.17,1852.21 4932.53,1852.21 4959.68,1825.06 U2.24
SPI_NCS: U2.21 U3.1 | length 559.1
  Top Layer w10: U3.1 4665,2040 4680,2055 4690.61,2055 4696.26,2060.65 4839.23,2060.65 4840.88,2059 4846,2059 4870,2035 v4(4870,1980) ; v4(4990,1885) 5010.97,1885 5011.85,1884.12 U2.21
  Bottom Layer w10: v4(4870,1980) 4870,1915 4900,1885 v4(4990,1885)
SPI_NHLD: U2.19 U3.7 | length 130.4
  Top Layer w10: U3.7 4929.95,1990 4944.09,1975.86 4949.99,1975.86 4965.81,1960.04 4965.81,1959.22 5001.54,1923.49 U2.19
SPI_NWP: U2.20 U3.3 | length 554.6
  Top Layer w10: U3.3 4649.08,1940 4681.75,1907.34 4681.75,1878.92 4691.31,1869.35 4839.23,1869.35 4849.97,1880.1 4849.97,1949.12 4860.72,1959.86 4943.36,1959.86 4949.81,1953.41 4949.81,1952.59 4998.28,1904.12 5022.17,1904.12 U2.20
USB_D_N: D1.4 J1.A7 J1.B7 | length 247.2
  Top Layer w8: J1.A7 4249.69,1715.16 4245,1719.84 4245,1741.97 4255.07,1752.05 4261.91,1752.05 4262.49,1752.62 4284.62,1752.62 J1.B7 4326.04,1754.53 4339,1767.49 4339,1780.46 4375.94,1817.4 D1.4
USB_D_P: D1.6 J1.A6 J1.B6 | length 186.8
  Top Layer w8: J1.B6 4325.79,1695.47 4330.47,1700.16 4330.47,1730.53 4326.16,1734.84 ; J1.A6 4326.16,1734.84 ; D1.6 4333.91,1742.6 4326.16,1734.84
VDD_SPI: C14.2 C17.2 U2.18 U3.8 | length 881.4
  Top Layer w10: 4858.35,2076.65 4870,2065 4904.14,2065 4910,2059.14 4910,2043.86 4913.86,2040 U3.8 4959.16,2000.95 4959.16,1990.14 5005.81,1943.49 5022.17,1943.49 U2.18
  Top Layer w19.68: C14.2 4669.53,2208.47 4658,2220 4541.73,2220 4530.2,2208.47 C17.2 4530.2,2094.8 4543.51,2081.49 4847.86,2081.49 4849.51,2079.84 4854.63,2079.84 4857.83,2076.65 4858.35,2076.65
pads on no net: J1.A8 J1.B8 J1.MH J1.SH U2.4 U2.5 U2.6 U2.8 U2.9 U2.10 U2.12 U2.13 U2.27 U2.28

## Polygon pours and split planes (outlines as drawn)
GND on Int2 (PWR) "GND_L03_P001" (solid, remove dead copper, pour order 1): 4050.32,2165 cw(c4146.89,2165) 4078.61,2233.28 4100.32,2255 cw(c4148.61,2206.72) 4148.61,2275 5520.32,2275 cw(c5472.05,2226.72) 5540.32,2226.72 5545,1075 cw(c5506.46,1082.71) 5528.25,1050 4189.58,1050 cw(c4169.86,1164.01) 4085,1085.36 4050.32,1146.09
GND on Int1 (GND) "GND_L02_P000" (solid, pour order 0): 4050,2165 cw(c4146.57,2165) 4078.28,2233.28 4100,2255 cw(c4148.28,2206.72) 4148.28,2275 5520,2275 cw(c5471.72,2226.72) 5540,2226.72 5545,1075 cw(c5506.3,1083.1) 5527.93,1050 4191.42,1050 cw(c4190.21,1206.57) 4080.36,1095 4050,1150
GND on Top Layer "GND_L01_P002" (solid, pour order 2): 4045,2165.93 cw(c4143.63,2165.93) 4073.89,2235.68 4098.28,2260.07 cw(c4146.41,2211.94) 4146.41,2280 5520.47,2280 cw(c5520.47,2270.18) 5527.41,2277.12 cw(c5484.95,2234.66) 5545,2234.66 5545,1067.52 cw(c5538.91,1067.52) 5543.22,1063.22 cw(c5511.31,1095.12) 5511.31,1050 4156.42,1050 cw(c4156.42,1150) 4085.71,1079.29 4074.29,1090.71 cw(c4145,1161.42) 4045,1161.42 4045,1163.18

## Silkscreen, mask and mechanical layers (free items; w line width, h text height)
Top Overlay:
  drawing of 2 lines, arcs and shapes, not listed
  text "ESP32-IFA" at 4710,1155.33 h60
Bottom Overlay:
  text "Joshuav0.1" at 4790.11,1075.67 h60
Mechanical 1:
  lines w10: 4045.97,2160.15 cw(c4166.68,2160.15) 4081.33,2245.5 cw(c4164.97,2161.86) 4164.97,2280.15 ; 5508.79,1050 ccw(c5508.79,1101.21) 5545,1065 ccw(c5532.93,1077.07) 5550,1077.07 5550,1105 5550,1325 5769.64,1325 ccw(c5769.64,1410.36) 5830,1350 ccw(c5769.64,1410.36) 5855,1410.36 5855,1465 5855,1904.64 ccw(c5769.64,1904.64) 5830,1965 ccw(c5769.64,1904.64) 5769.64,1990 5545,1990 5545,2238.79 ccw(c5493.79,2238.79) 5530,2275 ccw(c5517.93,2262.93) 5517.93,2280 5410,2280 4163.99,2280 ccw(c4163.99,2161.72) 4080.36,2245.36 ccw(c4165.71,2160) 4045,2160 4045,1855 4045,1369.14 4045,1168.99 ccw(c4163.28,1168.99) 4079.64,1085.36 ccw(c4165,1170.71) 4165,1050 5510,1050 ; 5580,1323.79 cw(c5582.93,1320.86) 5582.93,1325

## Text inside footprints (layer, text, board x,y; h text height)
D2: Mechanical 13 "+" at 4892.6,1590.02 h19.68
D3: Mechanical 13 "+" at 5184.26,2006.18 h19.68 r90
D4: Mechanical 13 "+" at 5099.89,1996.06 h19.68 r90
D5: Mechanical 13 "+" at 5029.89,1991.06 h19.68 r90